# Altium PCB broken_sodimm_stackup.PcbDoc (part 3 of 7)
Units mm, origin at the board's own origin, x right, y up, seen from the top; angles counter-clockwise.
Board outline 69.63 x 30.03 mm, 8 copper layers (TOP, SIGA__, L3, PWR4, L5, L6, SIGB__, BOTTOM), stack 1.2 mm thick; 199 components, 229 nets, 1321 pads, 785 vias.
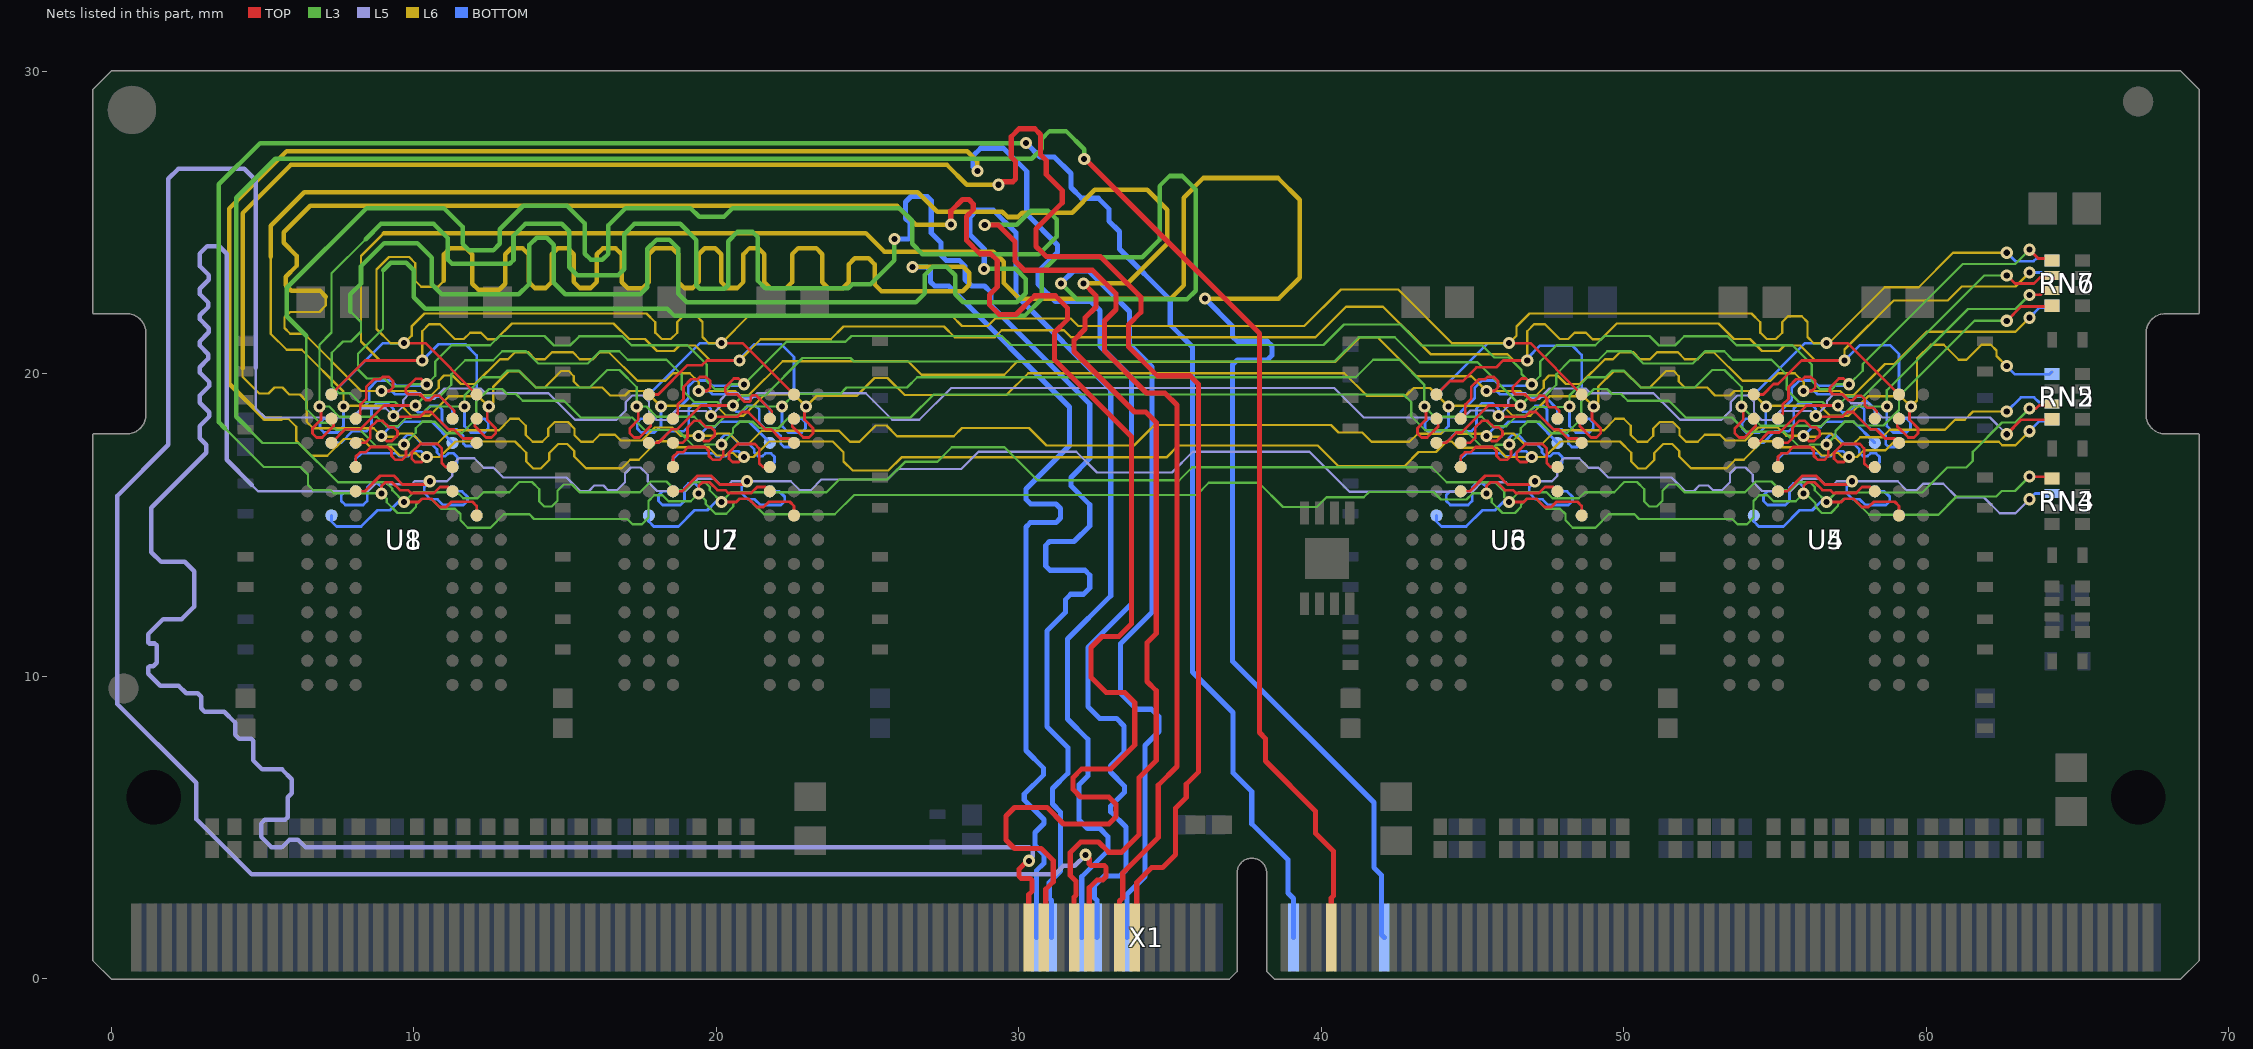
[diagram p8: the nets of this part, all layers, seen from the top]

## Via types
v1: diameter 0.4, hole 0.2, TOP to BOTTOM, tented both sides, 785 vias

## Nets (pads, with @x,y where several pads share a name; then routed paths per layer and width w, separated by ;. In a path a pad name is that pad's centre, name@x,y a point inside that pad or via, vN(x,y) a via of type N, cw(c..) or ccw(c..) an arc to the next point about the centre after c; other vN are vias at no path point) (continued)
A01: RN5.2 U1.L7 U2.L7 U3.L7 U4.L7 U5.L7 U6.L7 U7.L7 U8.L7 X1.133 | length 158.5
  TOP w0.09: U1.L7@8.073,17.717 8.388,17.717 8.553,17.882 8.553,18.225 8.772,18.444 8.962,18.444 9.17,18.237 9.322,18.237 9.453,18.106 9.453,17.969 9.265,17.78 9.093,17.78 v1(8.923,17.95) ; U2.L7@18.563,17.717 18.878,17.717 19.043,17.882 19.043,18.225 19.262,18.444 19.452,18.444 19.66,18.237 19.812,18.237 19.943,18.106 19.943,17.969 19.755,17.78 19.583,17.78 v1(19.413,17.95) ; U3.L7@44.603,17.717 44.918,17.717 45.083,17.882 45.083,18.225 45.302,18.444 45.492,18.444 45.7,18.237 45.852,18.237 45.983,18.106 45.983,17.969 45.795,17.78 45.623,17.78 v1(45.453,17.95) ; U4.L7@55.093,17.717 55.408,17.717 55.573,17.882 55.573,18.225 55.792,18.444 55.982,18.444 56.19,18.237 56.342,18.237 56.473,18.106 56.473,17.969 56.285,17.78 56.113,17.78 v1(55.943,17.95)
  TOP w0.17: v1(29.322,26.25) 29.42,26.348 29.793,26.348 29.888,26.443 29.888,27.026 29.744,27.17 29.744,27.84 30.005,28.101 30.525,28.101 30.712,27.914 30.712,27.242 30.901,27.053 30.901,26.591 31.43,26.062 31.43,25.656 30.568,24.794 30.568,24.209 30.761,24.016 30.899,23.878 32.689,23.878 32.718,23.849 34.029,22.538 34.029,22.037 33.618,21.626 33.618,20.894 34.575,19.937 35.656,19.937 35.93,19.663 35.93,6.831 35.53,6.431 35.53,5.993 35.176,5.639 35.176,4.104 34.751,3.679 34.391,3.679 33.894,3.182 33.894,1.434 X1.133@33.825,1.365
  L6 w0.075: 4.334,20.182 4.334,19.9 4.882,19.352 5.193,19.352 5.387,19.546 5.65,19.546 5.879,19.317 6.231,19.317 6.459,19.089 6.459,18.408 6.667,18.2 8.673,18.2 v1(8.923,17.95) 8.954,17.92 9.415,17.92 9.523,18.028 9.931,18.028 10.273,17.687 10.77,17.687 11.22,18.136 12.808,18.136 13.184,18.513 13.466,18.513 13.698,18.28 13.698,17.979 13.923,17.755 14.239,17.755 14.436,17.952 14.436,18.191 14.654,18.41 15.088,18.41 15.31,18.188 15.31,17.967 15.522,17.755 15.913,17.755 16.144,17.985 16.646,17.985 16.834,17.797 17.53,17.797 17.959,18.226 18.532,18.226 18.808,17.95 v1(19.413,17.95) 19.939,17.95 20.017,18.028 20.421,18.028 20.763,17.687 21.063,17.687 21.496,18.119 24.048,18.119 24.413,17.755 24.729,17.755 25.265,18.291 25.618,18.291 25.972,17.937 27.847,17.937 28.117,18.207 30.335,18.207 30.911,17.631 33.805,17.631 34.483,18.309 40.318,18.309 40.565,18.062 41.345,18.062 41.653,17.755 42.912,17.755 43.181,18.023 43.956,18.023 44.058,18.125 44.422,18.125 44.524,18.023 45.38,18.023 v1(45.453,17.95) 45.484,17.92 45.945,17.92 46.053,18.028 46.353,18.028 46.694,17.687 47.3,17.687 47.75,18.136 49.338,18.136 49.715,18.513 49.996,18.513 50.228,18.28 50.228,17.979 50.453,17.755 50.768,17.755 50.965,17.952 50.965,18.191 51.184,18.41 51.618,18.41 51.84,18.188 51.84,17.967 52.052,17.755 52.443,17.755 52.674,17.985 53.176,17.985 53.364,17.797 54.01,17.797 54.439,18.226 55.089,18.226 55.365,17.95 v1(55.943,17.95) 55.973,17.92 56.435,17.92 56.543,18.028 56.843,18.028 57.184,17.687 57.593,17.687 57.809,17.902 58.536,17.902 58.785,18.151 60.614,18.151 60.943,18.48 61.27,18.48 61.544,18.753 v1(62.656,18.753)
  L6 w0.15: 4.334,20.182 4.334,25.316 5.923,26.905 27.621,26.905 28.276,26.25 v1(29.322,26.25)
  BOTTOM w0.09: v1(8.923,17.95) 9.208,18.237 9.471,18.237 9.653,18.419 10.576,18.419 11.273,17.722 U8.L7@11.273,17.717 ; v1(19.413,17.95) 19.698,18.237 19.94,18.237 20.122,18.419 21.066,18.419 21.763,17.722 U7.L7@21.763,17.717 ; v1(45.453,17.95) 45.738,18.237 46.007,18.237 46.189,18.419 47.106,18.419 47.803,17.722 U6.L7@47.803,17.717 ; v1(55.943,17.95) 56.228,18.237 56.497,18.237 56.679,18.419 57.596,18.419 58.293,17.722 U5.L7@58.293,17.717 ; v1(62.656,18.753) 63.126,19.223 63.559,19.223 63.712,19.07 64.074,19.07 RN5.2@64.149,18.995
A02: RN7.1 U1.M3 U2.M3 U3.M3 U4.M3 U5.M3 U6.M3 U7.M3 U8.M3 X1.132 | length 160.5
  TOP w0.09: v1(10.423,19.654) 10.241,19.836 10.054,19.836 9.728,19.51 9.728,19.399 9.803,19.324 10.206,19.324 10.404,19.126 10.531,19.126 10.684,19.279 10.823,19.279 11.334,18.768 11.334,18.578 U1.M3@11.273,18.517 ; v1(20.913,19.654) 20.725,19.842 20.574,19.842 20.293,19.561 20.293,19.404 20.373,19.324 20.685,19.324 20.932,19.077 21.088,19.077 21.131,19.12 21.131,19.236 21.186,19.291 21.301,19.291 21.825,18.768 21.825,18.578 U2.M3@21.763,18.517 ; v1(46.953,19.654) 46.765,19.842 46.614,19.842 46.323,19.551 46.323,19.414 46.413,19.324 46.736,19.324 46.934,19.126 47.061,19.126 47.207,19.272 47.36,19.272 47.455,19.177 47.455,18.979 47.542,18.892 47.74,18.892 47.864,18.768 47.864,18.578 U3.M3@47.803,18.517 ; v1(57.443,19.654) 57.255,19.842 57.104,19.842 56.813,19.551 56.813,19.414 56.903,19.324 57.226,19.324 57.424,19.126 57.551,19.126 57.697,19.272 57.85,19.272 57.959,19.163 57.959,18.965 58.041,18.882 58.239,18.882 58.354,18.768 58.354,18.578 U4.M3@58.293,18.517 ; v1(63.406,24.103) 63.697,23.812 RN7.1@64.149,23.812
  L3 w0.075: 8.979,23.424 8.979,21.489 8.15,20.66 8.15,20.141 8.449,19.842 9.028,19.842 9.279,19.591 9.823,19.591 9.886,19.654 v1(10.423,19.654) 10.704,19.935 10.704,20.41 11.241,20.947 12.52,20.947 12.826,21.252 14.312,21.252 14.629,20.935 15.157,20.935 15.468,21.246 16.894,21.246 17.193,20.947 19.04,20.947 19.68,20.307 19.68,19.765 19.951,19.494 20.348,19.494 20.508,19.654 v1(20.913,19.654) 22.317,21.058 24.267,21.058 24.461,21.252 29.435,21.252 29.737,20.95 40.066,20.95 40.743,21.627 42.612,21.627 43.303,20.936 45.317,20.936 45.715,20.538 46.196,20.538 46.611,20.123 46.611,19.996 v1(46.953,19.654) 47.234,19.935 47.234,20.41 47.771,20.947 49.05,20.947 49.356,21.252 50.842,21.252 51.159,20.935 51.687,20.935 51.998,21.246 53.424,21.246 53.723,20.947 55.57,20.947 56.21,20.307 56.21,19.765 56.481,19.494 56.878,19.494 57.038,19.654 v1(57.443,19.654) 57.894,20.105 57.894,20.328 61.2,23.633 62.936,23.633 v1(63.406,24.103)
  L3 w0.15: 8.979,23.424 9.233,23.678 9.747,23.678 9.996,23.429 9.996,22.528 10.375,22.149 18.378,22.149 18.614,21.913 30.184,21.913 30.756,22.484 30.756,23.368 31.243,23.855 34.073,23.855 34.647,24.429 34.647,26.208 34.979,26.54 35.399,26.54 35.844,26.095 35.844,22.75 35.556,22.462 31.919,22.462 v1(31.39,22.991)
  BOTTOM w0.09: U8.M3@8.073,18.517 8.073,18.649 8.524,19.1 8.524,19.523 8.78,19.779 9.238,19.779 9.408,19.609 10.378,19.609 v1(10.423,19.654) ; U7.M3@18.563,18.517 18.563,18.684 19.068,19.189 19.068,19.577 19.27,19.779 19.679,19.779 19.849,19.609 20.868,19.609 v1(20.913,19.654) ; U6.M3@44.603,18.517 44.603,18.729 45.067,19.193 45.067,19.536 45.31,19.779 45.719,19.779 45.889,19.609 46.908,19.609 v1(46.953,19.654) ; U5.M3@55.093,18.517 55.093,18.681 55.549,19.137 55.549,19.528 55.8,19.779 56.25,19.779 56.42,19.609 57.398,19.609 v1(57.443,19.654)
  BOTTOM w0.17: v1(31.39,22.991) 31.8,23.401 32.31,23.401 33.653,22.058 33.653,20.972 34.394,20.231 34.394,12.116 33.355,11.077 33.355,9.44 33.883,8.912 34.38,8.912 34.626,8.666 34.626,8.173 34.166,7.713 34.166,3.384 33.575,2.793 X1.132@33.575,1.365
A03: RN7.4 U1.K7 U2.K7 U3.K7 U4.K7 U5.K7 U6.K7 U7.K7 U8.K7 X1.131 | length 159.3
  TOP w0.09: U1.K7@8.073,16.917 8.073,17.258 8.219,17.405 8.398,17.405 8.573,17.58 9.126,17.58 9.255,17.451 9.255,17.293 9.39,17.158 9.606,17.158 9.733,17.285 9.733,17.605 v1(9.673,17.665) ; U2.K7@18.563,16.917 18.563,17.258 18.709,17.405 18.888,17.405 19.063,17.58 19.616,17.58 19.745,17.451 19.745,17.293 19.88,17.158 20.096,17.158 20.223,17.285 20.223,17.605 v1(20.163,17.665) ; U3.K7@44.603,16.917 44.603,17.258 44.749,17.405 44.928,17.405 45.103,17.58 45.656,17.58 45.785,17.451 45.785,17.293 45.92,17.158 46.136,17.158 46.263,17.285 46.263,17.605 v1(46.208,17.659) ; U4.K7@55.093,16.917 55.093,17.258 55.207,17.372 55.385,17.372 55.593,17.58 56.146,17.58 56.275,17.451 56.275,17.293 56.41,17.158 56.626,17.158 56.753,17.285 56.753,17.605 v1(56.693,17.665) ; v1(62.656,21.753) 63.126,22.223 64.112,22.223 64.122,22.214 RN7.4@64.149,22.186
  TOP w0.17: v1(28.869,24.923) 29.317,24.923 29.872,24.368 29.872,23.733 30.182,23.423 32.432,23.423 33.206,22.649 33.206,22.13 32.825,21.749 32.825,20.76 34.218,19.367 34.823,19.367 35.222,18.968 35.222,7.019 34.603,6.4 34.603,4.675 33.43,3.502 33.43,2.68 33.325,2.575 X1.131@33.325,1.365
  L3 w0.075: 6.435,21.264 6.435,18.842 6.893,18.385 7.186,18.385 7.431,18.14 8.22,18.14 8.773,17.587 9.073,17.587 9.151,17.665 v1(9.673,17.665) 10.06,18.052 10.06,18.199 10.272,18.411 10.697,18.411 11.072,18.037 11.576,18.037 12.056,18.517 12.056,19.076 12.482,19.502 12.907,19.502 13.079,19.33 13.373,19.33 13.594,19.109 14.956,19.109 15.511,18.555 17.213,18.555 17.627,18.14 18.71,18.14 19.263,17.587 19.563,17.587 19.641,17.665 v1(20.163,17.665) 20.55,18.052 20.55,18.199 20.762,18.411 21.21,18.411 21.412,18.209 22.048,18.209 22.394,18.555 26.418,18.555 27.18,19.316 42.717,19.316 42.965,19.067 42.965,18.598 43.433,18.131 44.759,18.131 45.303,17.588 45.701,17.588 45.779,17.665 45.785,17.659 v1(46.208,17.659) 46.208,17.67 46.59,18.052 46.59,18.199 46.802,18.411 47.228,18.411 47.602,18.037 48.106,18.037 48.586,18.517 48.586,19.076 49.012,19.502 49.437,19.502 49.609,19.33 49.903,19.33 50.124,19.109 51.486,19.109 52.041,18.555 53.576,18.555 54.05,18.081 55.299,18.081 55.793,17.587 56.093,17.587 56.171,17.665 v1(56.693,17.665) 56.991,17.963 56.991,18.109 57.293,18.411 57.593,18.411 57.714,18.291 58.579,18.291 59.094,18.805 59.094,19.26 61.587,21.753 v1(62.656,21.753)
  L3 w0.15: 6.435,21.264 5.795,21.904 5.795,22.841 8.435,25.481 10.99,25.481 11.605,24.866 11.605,24.302 11.82,24.087 12.627,24.087 12.837,24.297 12.837,24.784 13.61,25.557 15.059,25.557 15.645,24.971 15.645,23.972 15.85,23.767 16.225,23.767 16.43,23.972 16.43,24.911 17,25.481 19.137,25.481 19.426,25.192 20.249,25.192 20.537,25.48 22.2,25.48 22.201,25.481 26.043,25.481 26.467,25.057 26.467,24.296 26.809,23.954 30.662,23.954 31.243,24.535 31.243,25.108 30.96,25.391 30.391,25.391 29.923,24.923 v1(28.869,24.923)
  BOTTOM w0.09: v1(9.673,17.665) 9.673,17.874 9.786,17.987 9.961,17.987 10.27,17.679 10.587,17.679 10.762,17.504 10.762,17.397 10.881,17.278 11.038,17.278 11.132,17.372 11.315,17.372 11.428,17.259 11.428,17.072 U8.K7@11.273,16.917 ; v1(20.163,17.665) 20.163,17.874 20.276,17.987 20.451,17.987 20.76,17.679 21.077,17.679 21.252,17.504 21.252,17.397 21.371,17.278 21.528,17.278 21.622,17.372 21.805,17.372 21.918,17.259 21.918,17.072 U7.K7@21.763,16.917 ; v1(46.208,17.659) 46.208,17.869 46.203,17.874 46.316,17.987 46.491,17.987 46.8,17.679 47.117,17.679 47.292,17.504 47.292,17.397 47.411,17.278 47.568,17.278 47.662,17.372 47.845,17.372 47.958,17.259 47.958,17.072 U6.K7@47.803,16.917 ; v1(56.693,17.665) 56.693,17.874 56.806,17.987 56.981,17.987 57.29,17.679 57.607,17.679 57.782,17.504 57.782,17.397 57.901,17.278 58.058,17.278 58.152,17.372 58.335,17.372 58.448,17.259 58.448,17.072 U5.K7@58.293,16.917
A04: RN5.1 U1.K3 U2.K3 U3.K3 U4.K3 U5.K3 U6.K3 U7.K3 U8.K3 X1.128 | length 157.7
  TOP w0.09: v1(10.423,17.249) 10.256,17.082 10.038,17.082 9.923,17.197 9.923,17.392 10.21,17.679 10.779,17.679 10.921,17.537 10.921,17.045 11.049,16.917 U1.K3@11.273,16.917 ; v1(20.913,17.249) 20.746,17.082 20.528,17.082 20.413,17.197 20.413,17.392 20.7,17.679 21.269,17.679 21.411,17.537 21.411,17.045 21.539,16.917 U2.K3@21.763,16.917 ; v1(46.953,17.249) 46.786,17.082 46.568,17.082 46.453,17.197 46.453,17.392 46.74,17.679 47.309,17.679 47.451,17.537 47.451,17.045 47.579,16.917 U3.K3@47.803,16.917 ; v1(57.443,17.249) 57.276,17.082 57.058,17.082 56.943,17.197 56.943,17.392 57.23,17.679 57.799,17.679 57.941,17.537 57.941,17.045 58.069,16.917 U4.K3@58.293,16.917
  L6 w0.075: 5.607,18.517 5.842,18.517 6.111,18.248 6.111,17.792 6.614,17.289 7.133,17.289 7.69,17.846 8.29,17.846 8.548,17.588 9.238,17.588 9.523,17.303 9.823,17.303 9.895,17.374 10.064,17.374 10.189,17.249 v1(10.423,17.249) 10.852,17.249 11.369,17.766 13.337,17.766 13.711,17.392 13.711,17.106 13.943,16.873 14.195,16.873 14.472,17.15 14.472,17.384 14.768,17.679 15.068,17.679 15.301,17.447 15.301,17.266 15.688,16.88 16.875,16.88 17.153,17.158 17.432,17.158 18.046,17.772 18.395,17.772 18.597,17.57 19.745,17.57 20.013,17.303 20.309,17.303 20.386,17.379 20.555,17.379 20.685,17.249 v1(20.913,17.249) 21.225,17.249 21.742,17.766 23.844,17.766 24.201,17.41 24.201,17.106 24.504,16.802 25.683,16.802 26.119,17.238 34.876,17.238 35.267,17.629 39.878,17.629 40.553,16.954 42.753,16.954 43.212,17.413 43.786,17.413 44.134,17.761 44.311,17.761 44.518,17.554 45.801,17.554 46.103,17.253 46.949,17.253 v1(46.953,17.249) 47.382,17.249 47.899,17.766 49.867,17.766 50.24,17.392 50.24,17.106 50.473,16.873 50.725,16.873 51.002,17.15 51.002,17.384 51.298,17.679 51.598,17.679 51.831,17.447 51.831,17.266 52.218,16.88 53.405,16.88 53.683,17.158 53.962,17.158 54.576,17.772 54.925,17.772 55.127,17.57 56.275,17.57 56.543,17.303 56.839,17.303 56.916,17.379 57.085,17.379 57.215,17.249 v1(57.443,17.249) 57.705,17.249 57.929,17.473 58.649,17.473 58.931,17.755 62.392,17.755 62.506,17.641 62.943,17.641 v1(63.406,18.103)
  L6 w0.15: 5.607,18.517 5.057,18.517 3.897,19.677 3.897,25.465 5.787,27.355 28.291,27.355 28.623,27.023 v1(28.623,26.707)
  BOTTOM w0.09: U8.K3@8.073,16.917 8.073,17.186 8.257,17.37 9.422,17.37 9.517,17.275 9.806,17.275 9.974,17.443 10.229,17.443 v1(10.423,17.249) ; U7.K3@18.563,16.917 18.563,17.186 18.747,17.37 19.912,17.37 20.007,17.275 20.296,17.275 20.464,17.443 20.719,17.443 v1(20.913,17.249) ; U6.K3@44.603,16.917 44.603,17.186 44.787,17.37 45.952,17.37 46.047,17.275 46.336,17.275 46.504,17.443 46.759,17.443 v1(46.953,17.249) ; U5.K3@55.093,16.917 55.093,17.186 55.277,17.37 56.442,17.37 56.537,17.275 56.826,17.275 56.994,17.443 57.249,17.443 v1(57.443,17.249) ; v1(63.406,18.103) 63.739,18.436 RN5.1@64.149,18.436
  BOTTOM w0.17: v1(28.623,26.707) 28.484,26.846 28.484,27.208 28.735,27.459 29.491,27.459 30.256,26.694 30.256,25.282 31.275,24.263 31.275,24.02 30.632,23.377 30.632,22.964 31.206,22.39 32.383,22.39 32.677,22.096 32.677,20.92 33.72,19.877 33.72,12.399 32.279,10.958 32.279,8.997 32.665,8.611 33.221,8.611 33.471,8.361 33.471,7.485 33.022,7.036 33.022,6.833 33.489,6.366 33.489,6.169 33.032,5.712 33.032,5.519 33.535,5.016 33.535,3.595 33.341,3.401 32.821,3.401 32.497,3.077 32.497,2.675 32.575,2.597 X1.128@32.575,1.365
A05: RN7.2 U1.L8 U2.L8 U3.L8 U4.L8 U5.L8 U6.L8 U7.L8 U8.L8 X1.126 | length 160.9
  TOP w0.09: U1.L8@7.273,17.717 7.728,18.172 8.231,18.172 9.013,18.954 v1(10.053,18.954) ; U2.L8@17.763,17.717 18.075,17.717 18.53,18.172 18.706,18.172 19.486,18.952 20.541,18.952 v1(20.543,18.954) ; U3.L8@43.803,17.717 44.115,17.717 44.46,18.062 44.636,18.062 45.528,18.954 v1(46.583,18.954) ; U4.L8@54.293,17.717 54.427,17.717 54.772,18.062 55.141,18.062 56.033,18.954 v1(57.073,18.954) ; v1(62.656,23.253) 62.926,22.983 63.559,22.983 63.757,23.181 64.077,23.181 RN7.2@64.149,23.253
  L3 w0.075: 7.899,22.061 8.249,21.711 8.249,21.4 7.92,21.071 7.656,21.071 7.28,20.695 7.28,19.596 7.518,19.358 7.899,19.358 8.186,19.071 9.372,19.071 9.489,18.954 v1(10.053,18.954) 10.383,19.284 10.88,19.284 11.234,19.638 11.234,19.99 11.691,20.447 12.624,20.447 12.922,20.745 13.702,20.745 14.106,20.341 15.746,20.341 16.15,20.745 16.787,20.745 17.063,20.469 18.351,20.469 18.851,19.969 18.851,19.482 19.262,19.072 20.031,19.072 20.148,18.954 v1(20.543,18.954) 20.873,19.284 21.609,19.284 22.845,20.52 24.435,20.52 24.544,20.411 40.434,20.411 41.233,21.211 42.42,21.211 43.25,20.381 45.156,20.381 v1(46.583,18.954) 46.913,19.284 47.41,19.284 47.764,19.638 47.764,19.99 48.221,20.447 49.154,20.447 49.452,20.745 50.232,20.745 50.636,20.341 52.276,20.341 52.68,20.745 53.317,20.745 53.593,20.469 54.881,20.469 55.381,19.969 55.381,19.482 55.791,19.072 56.56,19.072 56.678,18.954 v1(57.073,18.954) 57.379,19.26 57.918,19.26 61.911,23.253 v1(62.656,23.253)
  L3 w0.15: 7.899,22.061 7.899,22.631 8.249,22.981 8.249,23.556 9.016,24.323 10.109,24.323 10.588,23.844 10.588,22.956 10.919,22.625 13.467,22.625 13.81,22.968 13.81,24.261 14.053,24.504 14.384,24.504 14.617,24.271 14.617,23.012 15.004,22.625 17.479,22.625 17.712,22.858 17.712,24.13 18.022,24.44 18.442,24.44 18.739,24.143 18.739,22.65 19.022,22.367 26.594,22.367 26.885,22.658 26.885,23.267 27.152,23.534 27.617,23.534 27.893,23.258 27.893,22.628 28.159,22.362 29.927,22.362 30.226,22.661 30.226,23.135 29.893,23.468 v1(28.851,23.468)
  BOTTOM w0.09: v1(10.053,18.954) 10.053,18.805 10.129,18.729 10.335,18.729 10.549,18.943 10.806,18.943 10.928,18.821 10.928,18.374 11.13,18.172 11.409,18.172 11.631,17.95 11.631,17.696 11.712,17.615 11.971,17.615 U8.L8@12.073,17.717 ; v1(20.543,18.954) 20.543,18.861 20.658,18.746 20.86,18.746 20.978,18.864 20.978,18.896 21.025,18.943 21.293,18.943 21.418,18.818 21.418,18.374 21.62,18.172 21.899,18.172 22.121,17.95 22.121,17.696 22.237,17.58 22.426,17.58 U7.L8@22.563,17.717 ; v1(46.583,18.954) 46.583,18.825 46.659,18.749 46.885,18.749 47.079,18.943 47.333,18.943 47.458,18.818 47.458,18.374 47.66,18.172 47.939,18.172 48.161,17.95 48.161,17.696 48.277,17.58 48.466,17.58 U6.L8@48.603,17.717 ; v1(57.073,18.954) 57.073,18.875 57.23,18.718 57.401,18.718 57.625,18.942 57.824,18.942 57.948,18.818 57.948,18.374 58.15,18.172 58.422,18.172 58.651,17.943 58.651,17.684 58.755,17.58 58.956,17.58 U5.L8@59.093,17.717
  BOTTOM w0.17: v1(28.851,23.468) 28.851,24.124 28.378,24.597 28.378,25.188 28.601,25.411 29.15,25.411 29.899,24.662 29.899,22.603 33.033,19.469 33.033,12.662 31.608,11.237 31.608,8.591 32.277,7.922 32.277,6.703 31.988,6.414 31.988,5.246 32.264,4.97 32.677,4.97 32.938,4.709 32.938,4.237 32.075,3.374 X1.126@32.075,1.365
A06: RN2.4 U1.L2 U2.L2 U3.L2 U4.L2 U5.L2 U6.L2 U7.L2 U8.L2 X1.127 | length 161.2
  TOP w0.09: v1(9.323,18.607) 9.346,18.584 10.207,18.584 10.358,18.735 10.558,18.735 11.121,18.172 11.306,18.172 11.618,17.86 11.93,17.86 U1.L2@12.073,17.717 ; v1(19.813,18.607) 19.836,18.584 20.697,18.584 20.848,18.735 21.048,18.735 21.611,18.172 21.796,18.172 22.108,17.86 22.42,17.86 U2.L2@22.563,17.717 ; v1(45.853,18.607) 45.876,18.584 46.737,18.584 46.888,18.735 47.088,18.735 47.651,18.172 47.836,18.172 48.148,17.86 48.46,17.86 U3.L2@48.603,17.717 ; v1(56.343,18.607) 56.366,18.584 57.227,18.584 57.378,18.735 57.578,18.735 58.141,18.172 58.326,18.172 58.638,17.86 58.95,17.86 U4.L2@59.093,17.717 ; v1(62.656,18.003) 63.136,18.483 RN2.4@64.102,18.483 ; RN2.4@64.149,18.436 RN2.4@64.102,18.483 ; RN2.4@64.157,18.499 64.141,18.483 RN2.4@64.102,18.483
  TOP w0.17: v1(32.2,4.1) 32.325,3.975 32.325,3.796 32.381,3.74 32.825,3.74 32.882,3.683 32.882,3.38 32.774,3.272 32.587,3.272 32.325,3.01 X1.127@32.325,1.365
  L5 w0.075: 4.771,20.207 4.771,18.856 5.073,18.555 7.972,18.555 8.28,18.862 9.068,18.862 v1(9.323,18.607) 9.646,18.93 9.646,19.137 9.864,19.355 10.209,19.355 10.395,19.17 10.662,19.17 11.005,19.513 12.205,19.513 12.364,19.355 14.447,19.355 15.322,18.48 16.693,18.48 17,18.787 17,19.067 17.215,19.282 17.565,19.282 17.767,19.08 17.767,18.721 18.015,18.473 18.338,18.473 18.635,18.77 19.65,18.77 v1(19.813,18.607) 20.136,18.93 20.136,19.137 20.354,19.355 20.699,19.355 20.884,19.17 21.152,19.17 21.337,19.355 24.937,19.355 25.812,18.48 26.708,18.48 27.758,19.53 40.424,19.53 41.4,18.555 44.689,18.555 44.926,18.791 45.669,18.791 v1(45.853,18.607) 46.176,18.93 46.176,19.137 46.394,19.355 46.74,19.355 46.924,19.17 47.192,19.17 47.535,19.513 48.735,19.513 48.894,19.355 50.977,19.355 51.852,18.48 53.223,18.48 53.53,18.787 53.53,19.067 53.745,19.282 54.095,19.282 54.297,19.08 54.297,18.721 54.545,18.473 54.868,18.473 55.165,18.77 56.18,18.77 v1(56.343,18.607) 56.711,18.975 56.711,19.105 56.923,19.317 57.223,19.317 57.514,19.026 58.071,19.026 58.543,18.555 62.105,18.555 v1(62.656,18.003)
  L5 w0.15: 4.771,20.207 4.771,26.398 4.384,26.785 2.214,26.785 1.881,26.452 1.881,17.652 0.191,15.962 0.191,9.085 2.8,6.476 2.8,5.282 4.63,3.452 31.192,3.452 31.473,3.733 31.848,3.733 32.2,4.085 v1(32.2,4.1)
  BOTTOM w0.09: U8.L2@7.273,17.717 7.585,17.717 7.974,18.106 8.432,18.106 8.596,18.27 8.596,18.852 8.775,19.031 9.126,19.031 9.323,18.834 v1(9.323,18.607) ; U7.L2@17.763,17.717 18.075,17.717 18.464,18.106 18.922,18.106 19.086,18.27 19.086,18.852 19.265,19.031 19.616,19.031 19.813,18.834 v1(19.813,18.607) ; U6.L2@43.803,17.717 44.115,17.717 44.504,18.106 44.962,18.106 45.126,18.27 45.126,18.852 45.305,19.031 45.656,19.031 45.853,18.834 v1(45.853,18.607) ; U5.L2@54.293,17.717 54.605,17.717 54.994,18.106 55.452,18.106 55.616,18.27 55.616,18.852 55.795,19.031 56.146,19.031 56.343,18.834 v1(56.343,18.607)
A07: RN7.3 U1.M8 U2.M8 U3.M8 U4.M8 U5.M8 U6.M8 U7.M8 U8.M8 X1.122 | length 153.8
  TOP w0.09: v1(6.873,18.917) 6.928,18.862 6.928,18.484 6.646,18.202 6.646,18.033 6.783,17.896 6.964,17.896 7.338,18.27 7.338,18.452 U1.M8@7.273,18.517 ; v1(17.363,18.917) 17.418,18.862 17.418,18.484 17.136,18.202 17.136,18.033 17.273,17.896 17.454,17.896 17.824,18.266 17.824,18.456 U2.M8@17.763,18.517 ; v1(43.403,18.917) 43.458,18.862 43.458,18.484 43.176,18.202 43.176,18.033 43.313,17.896 43.494,17.896 43.864,18.266 43.864,18.456 U3.M8@43.803,18.517 ; v1(53.893,18.917) 53.948,18.862 53.948,18.484 53.666,18.202 53.666,18.033 53.803,17.896 53.984,17.896 54.354,18.266 54.354,18.456 U4.M8@54.293,18.517 ; v1(63.406,22.603) 63.418,22.615 63.762,22.615 63.858,22.711 64.157,22.711 RN7.3@64.157,22.749
  L3 w0.075: 8.404,24.452 7.277,23.324 7.277,21.367 6.873,20.963 v1(6.873,18.917) 7.196,18.917 7.533,18.58 8.771,18.58 9.081,18.27 9.463,18.27 9.745,18.552 9.904,18.552 9.969,18.617 10.206,18.617 10.506,18.917 v1(11.673,18.917) 11.673,19.286 12.27,19.883 12.856,19.883 13.076,20.103 13.468,20.103 14.025,19.546 15.811,19.546 16.389,20.124 16.794,20.124 17.363,19.555 v1(17.363,18.917) 17.686,18.917 18.025,18.578 19.262,18.578 19.571,18.27 19.953,18.27 20.3,18.617 20.683,18.617 20.983,18.917 v1(22.163,18.917) 22.59,19.344 24.101,19.344 24.303,19.546 26.301,19.546 26.641,19.886 41.136,19.886 41.716,20.466 42.568,20.466 43.403,19.631 v1(43.403,18.917) 43.74,18.58 45.301,18.58 45.611,18.27 46.112,18.27 46.458,18.617 46.73,18.617 47.02,18.907 48.193,18.907 v1(48.203,18.917) 48.203,19.286 48.8,19.883 49.386,19.883 49.606,20.103 49.998,20.103 50.555,19.546 52.341,19.546 52.92,20.124 53.324,20.124 53.893,19.555 v1(53.893,18.917) 54.522,18.287 56.083,18.287 56.101,18.27 56.518,18.27 56.834,18.586 57.212,18.586 57.543,18.917 v1(58.693,18.917) 58.693,19.458 61.376,22.141 62.943,22.141 v1(63.406,22.603)
  L3 w0.15: 8.404,24.452 8.91,24.957 10.647,24.957 11.113,24.491 11.113,23.778 11.257,23.634 13.161,23.634 13.29,23.763 13.29,24.562 13.685,24.957 14.887,24.957 15.136,24.708 15.136,23.521 15.399,23.258 16.747,23.258 16.949,23.46 16.949,24.617 17.289,24.957 18.802,24.957 19.337,24.422 19.337,22.925 19.445,22.817 20.274,22.817 20.387,22.93 20.387,24.388 20.688,24.689 21.193,24.689 21.371,24.511 21.371,23.07 21.614,22.828 24.359,22.828 24.495,22.963 25.094,22.963 25.879,23.748 25.879,24.46 v1(25.881,24.462)
  BOTTOM w0.09: v1(11.673,18.917) 11.673,18.27 11.881,18.062 12.325,18.062 12.454,18.191 12.454,18.387 12.324,18.517 U8.M8@12.073,18.517 ; v1(22.163,18.917) 22.163,18.27 22.371,18.062 22.815,18.062 22.944,18.191 22.944,18.387 22.814,18.517 U7.M8@22.563,18.517 ; v1(48.203,18.917) 48.203,18.27 48.411,18.062 48.855,18.062 48.984,18.191 48.984,18.387 48.854,18.517 U6.M8@48.603,18.517 ; v1(58.693,18.917) 58.693,18.27 58.901,18.062 59.345,18.062 59.474,18.191 59.474,18.387 59.344,18.517 U5.M8@59.093,18.517
  BOTTOM w0.17: v1(25.881,24.462) 26.338,24.462 26.401,24.525 26.401,24.991 26.253,25.139 26.253,25.684 26.431,25.862 26.967,25.862 27.099,25.73 27.099,24.656 27.424,24.331 27.424,23.918 27.59,23.752 28.025,23.752 28.22,23.557 28.22,23.122 28.439,22.903 28.861,22.903 29.066,22.698 29.066,22.275 32.342,18.999 32.342,17.201 31.716,16.575 31.716,16.299 32.342,15.673 32.342,14.974 31.822,14.454 31.009,14.454 30.885,14.33 30.885,13.648 31.028,13.505 32.18,13.505 32.342,13.343 32.342,12.921 32.132,12.711 31.714,12.711 31.533,12.53 31.533,12.112 31.483,12.062 30.922,11.501 30.922,8.34 31.616,7.646 31.616,6.794 31.109,6.287 31.109,5.781 31.105,5.777 31.374,5.507 31.374,3.562 31,3.188 31,2.662 31.075,2.587 X1.122@31.075,1.365
A08: RN5.4 U1.M2 U2.M2 U3.M2 U4.M2 U5.M2 U6.M2 U7.M2 U8.M2 X1.125 | length 153.4
  TOP w0.09: U1.M2@12.073,18.517 12.012,18.456 12.012,18.266 12.382,17.896 12.563,17.896 12.7,18.033 12.7,18.202 12.418,18.484 12.418,18.862 v1(12.473,18.917) ; U2.M2@22.563,18.517 22.502,18.456 22.502,18.266 22.872,17.896 23.053,17.896 23.19,18.033 23.19,18.202 22.908,18.484 22.908,18.862 v1(22.963,18.917) ; U3.M2@48.603,18.517 48.542,18.456 48.542,18.266 48.912,17.896 49.093,17.896 49.23,18.033 49.23,18.202 48.948,18.484 48.948,18.862 v1(49.003,18.917) ; U4.M2@59.093,18.517 59.032,18.456 59.032,18.266 59.402,17.896 59.583,17.896 59.72,18.033 59.72,18.202 59.438,18.484 59.438,18.862 v1(59.493,18.917)
  TOP w0.17: X1.125@31.825,1.365 31.825,2.709 31.884,2.768 31.884,3.224 31.696,3.412 31.696,4.176 32.041,4.521 32.631,4.521 32.969,4.183 33.391,4.183 33.968,4.76 33.968,6.649 34.537,7.218 34.537,9.524 34.234,9.827 34.234,11.112 34.537,11.415 34.537,18.389 34.19,18.736 33.819,18.736 31.817,20.738 31.817,21.113 32.186,21.482 32.186,21.852 32.547,22.213 32.547,22.584 v1(32.14,22.991)
  L6 w0.075: 5.265,23.866 5.265,21.32 5.792,20.793 6.292,20.793 7.673,19.412 v1(7.673,18.917) 7.701,18.945 9.585,18.945 9.913,18.617 10.51,18.617 11.148,19.255 12.136,19.255 v1(12.473,18.917) 12.625,19.069 12.625,19.582 13.123,20.08 13.49,20.08 14.023,19.546 14.325,19.546 14.87,20.091 15.115,20.091 15.284,19.922 15.284,19.745 15.483,19.546 16.221,19.546 16.485,19.283 16.977,19.283 17.125,19.43 17.65,19.43 v1(18.163,18.917) 18.19,18.945 19.994,18.945 20.322,18.617 20.896,18.617 21.597,19.318 22.562,19.318 v1(22.963,18.917) 23.326,19.28 24.645,19.28 25.227,19.862 25.657,19.862 26.222,19.297 29.579,19.297 30.305,20.023 40.752,20.023 41.496,19.28 42.798,19.28 43.048,19.529 43.591,19.529 v1(44.203,18.917) 44.231,18.945 45.993,18.945 46.321,18.617 46.904,18.617 47.542,19.255 48.666,19.255 v1(49.003,18.917) 49.155,19.069 49.155,19.582 49.653,20.08 50.019,20.08 50.553,19.546 50.855,19.546 51.4,20.091 51.645,20.091 51.814,19.922 51.814,19.745 52.013,19.546 52.751,19.546 53.014,19.283 53.508,19.283 53.655,19.43 54.18,19.43 v1(54.693,18.917) 54.721,18.945 56.483,18.945 56.811,18.617 57.428,18.617 58.065,19.255 59.156,19.255 v1(59.493,18.917) 59.692,19.116 59.692,20.505 60.146,20.96 60.571,20.96 61.067,20.463 61.323,20.463 61.818,20.958 62.129,20.958 62.319,20.768 62.319,20.59 v1(62.656,20.253)
  L6 w0.15: 5.265,23.866 5.265,24.894 6.376,26.005 26.651,26.005 27.296,25.36 29.454,25.36 29.628,25.185 29.96,25.185 30.106,25.331 31.758,25.331 32.507,26.08 34.246,26.08 34.899,25.427 34.899,24.297 33.593,22.991 v1(32.14,22.991)
  BOTTOM w0.09: U8.M2@7.273,18.517 7.022,18.517 6.892,18.387 6.892,18.191 7.021,18.062 7.465,18.062 7.673,18.27 v1(7.673,18.917) ; U7.M2@17.763,18.517 17.512,18.517 17.382,18.387 17.382,18.191 17.511,18.062 17.955,18.062 18.163,18.27 v1(18.163,18.917) ; U6.M2@43.803,18.517 43.552,18.517 43.422,18.387 43.422,18.191 43.551,18.062 43.995,18.062 44.203,18.27 v1(44.203,18.917) ; U5.M2@54.293,18.517 54.042,18.517 53.912,18.387 53.912,18.191 54.041,18.062 54.485,18.062 54.693,18.27 v1(54.693,18.917) ; v1(62.656,20.253) 62.926,19.983 64.07,19.983 64.122,20.035 RN5.4@64.149,20.062
A09: RN6.1 U1.M7 U2.M7 U3.M7 U4.M7 U5.M7 U6.M7 U7.M7 U8.M7 X1.121 | length 159.4
  TOP w0.09: U1.M7@8.073,18.517 8.228,18.672 8.228,18.984 8.418,19.174 8.418,19.565 8.673,19.82 8.883,19.82 8.959,19.896 9.168,19.896 9.307,19.756 9.307,19.552 9.189,19.434 v1(8.923,19.434) ; U2.M7@18.563,18.517 18.718,18.672 18.718,18.984 18.908,19.174 18.908,19.565 19.163,19.82 19.373,19.82 19.449,19.896 19.657,19.896 19.797,19.756 19.797,19.552 19.68,19.434 v1(19.413,19.434) ; U3.M7@44.603,18.517 44.758,18.672 44.758,18.984 44.948,19.174 44.948,19.565 45.203,19.82 45.413,19.82 45.489,19.896 45.698,19.896 45.838,19.756 45.838,19.552 45.719,19.434 v1(45.453,19.434) ; U4.M7@55.093,18.517 55.248,18.672 55.248,18.984 55.438,19.174 55.438,19.565 55.693,19.82 55.903,19.82 55.979,19.896 56.188,19.896 56.327,19.756 56.327,19.552 56.209,19.434 v1(55.943,19.434)
  TOP w0.17: v1(27.747,24.931) 27.747,25.378 28.132,25.763 28.344,25.763 28.491,25.616 28.491,25.427 28.262,25.198 28.262,24.416 28.707,23.971 29.063,23.971 29.282,23.752 29.282,22.868 29.021,22.607 29.021,22.285 29.349,21.957 29.898,21.957 30.524,22.583 31.198,22.583 31.6,22.181 31.6,21.791 31.176,21.367 31.176,20.463 33.719,17.92 33.719,11.739 33.299,11.319 32.746,11.319 32.381,10.954 32.381,9.966 32.885,9.462 33.498,9.462 33.829,9.131 33.829,7.731 33.039,6.941 32.077,6.941 31.784,6.648 31.784,6.266 32.037,6.013 32.967,6.013 33.21,5.77 33.21,5.36 32.967,5.117 31.475,5.117 30.933,5.659 29.853,5.659 29.573,5.379 29.573,4.592 29.853,4.312 30.734,4.312 31.132,3.914 31.132,3.209 30.887,2.964 30.887,1.427 X1.121@30.825,1.365
  L6 w0.075: 7.087,22.553 7.087,22.257 6.877,22.047 5.907,22.047 5.719,21.859 5.719,21.511 5.907,21.323 6.37,21.323 8.259,19.434 v1(8.923,19.434) 10.043,19.434 10.185,19.292 10.573,19.292 10.818,19.536 10.818,19.767 10.995,19.944 11.276,19.944 11.559,19.661 12.02,19.661 12.845,20.486 13.112,20.486 13.341,20.715 13.783,20.715 14.012,20.486 14.333,20.486 14.563,20.715 15.254,20.715 15.483,20.486 15.914,20.486 16.144,20.715 16.441,20.715 17.387,19.769 18.314,19.769 18.566,20.021 19.12,20.021 19.413,19.728 v1(19.413,19.434) 20.62,19.434 20.763,19.291 21.063,19.291 22.189,20.417 26.331,20.417 26.777,19.971 29.513,19.971 29.938,20.396 40.463,20.396 41.277,21.211 41.851,21.211 43.139,19.923 44.964,19.923 v1(45.453,19.434) 46.573,19.434 46.715,19.292 47.103,19.292 47.348,19.536 47.348,19.767 47.525,19.944 47.806,19.944 48.089,19.661 48.55,19.661 49.374,20.486 49.642,20.486 49.872,20.715 50.313,20.715 50.542,20.486 50.863,20.486 51.093,20.715 51.784,20.715 52.013,20.486 52.445,20.486 52.674,20.715 52.971,20.715 53.917,19.769 54.844,19.769 55.096,20.021 55.65,20.021 55.943,19.728 v1(55.943,19.434) 57.15,19.434 57.293,19.292 57.593,19.292 58.629,20.327 58.942,20.327 60.006,21.391 62.943,21.391 v1(63.406,21.853)
  L6 w0.15: 7.087,22.553 6.893,22.747 5.943,22.747 5.762,22.928 5.762,23.21 6.118,23.566 6.118,23.907 5.694,24.331 5.694,24.679 6.57,25.555 25.969,25.555 26.593,24.931 v1(27.747,24.931)
  BOTTOM w0.09: v1(8.923,19.434) 9.265,19.434 9.375,19.324 10.229,19.324 10.307,19.246 10.856,19.246 11.273,18.829 U8.M7@11.273,18.517 ; v1(19.413,19.434) 19.755,19.434 19.865,19.324 20.719,19.324 20.797,19.246 21.346,19.246 21.763,18.829 U7.M7@21.763,18.517 ; v1(45.453,19.434) 45.795,19.434 45.905,19.324 46.759,19.324 46.837,19.246 47.386,19.246 47.803,18.829 U6.M7@47.803,18.517 ; v1(55.943,19.434) 56.285,19.434 56.395,19.324 57.249,19.324 57.327,19.246 57.876,19.246 58.293,18.829 U5.M7@58.293,18.517 ; v1(63.406,21.853) 63.739,22.186 RN6.1@64.149,22.186
A10: RN3.1 U1.J3 U2.J3 U3.J3 U4.J3 U5.J3 U6.J3 U7.J3 U8.J3 X1.146 | length 158.7
  TOP w0.09: v1(8.923,16.05) 8.923,16.286 9.053,16.416 9.28,16.416 9.541,16.155 9.802,16.155 9.898,16.059 10.656,16.059 10.857,16.26 11.13,16.26 U1.J3@11.273,16.117 ; v1(19.413,16.05) 19.413,16.286 19.543,16.416 19.77,16.416 20.031,16.155 20.292,16.155 20.388,16.059 21.146,16.059 21.347,16.26 21.62,16.26 U2.J3@21.763,16.117 ; v1(45.453,16.05) 45.453,16.286 45.583,16.416 45.81,16.416 46.071,16.155 46.332,16.155 46.428,16.059 47.186,16.059 47.387,16.26 47.66,16.26 U3.J3@47.803,16.117 ; v1(55.943,16.05) 55.943,16.286 56.073,16.416 56.3,16.416 56.561,16.155 56.822,16.155 56.918,16.059 57.676,16.059 57.877,16.26 58.15,16.26 U4.J3@58.293,16.117 ; v1(63.406,16.603) v1(63.406,16.603) 64.147,16.602 RN3.1@64.149,16.6
  L3 w0.075: 3.745,18.206 5.03,16.921 6.248,16.921 6.498,16.671 6.498,16.326 6.669,16.155 7.245,16.155 7.35,16.05 v1(8.923,16.05) 9.102,15.871 9.102,15.753 9.453,15.402 9.866,15.402 10.068,15.604 10.068,15.683 10.247,15.861 10.577,15.861 10.897,15.542 11.356,15.542 11.536,15.362 11.536,15.157 11.778,14.915 12.532,14.915 12.971,15.354 13.821,15.354 13.971,15.205 17.049,15.205 17.224,15.03 17.537,15.03 17.756,15.249 17.756,15.795 17.945,15.985 18.216,15.985 18.415,15.785 19.148,15.785 v1(19.413,16.05) 19.647,15.816 19.647,15.699 19.968,15.378 20.323,15.378 20.558,15.613 20.558,15.687 20.733,15.861 21.067,15.861 21.575,15.355 23.913,15.355 24.554,15.995 35.874,15.995 36.277,16.399 37.925,16.399 38.726,15.597 39.843,15.597 40.163,15.918 41.401,15.918 41.578,16.094 43.701,16.094 43.952,15.844 44.796,15.844 45.003,16.05 v1(45.453,16.05) 45.632,15.871 45.632,15.753 45.983,15.402 46.396,15.402 46.598,15.604 46.598,15.683 46.777,15.861 47.108,15.861 47.427,15.542 47.886,15.542 48.066,15.362 48.066,15.157 48.308,14.915 49.062,14.915 49.501,15.354 50.351,15.354 50.501,15.205 53.579,15.205 53.754,15.03 54.067,15.03 54.286,15.249 54.286,15.795 54.475,15.985 54.745,15.985 54.945,15.785 55.678,15.785 v1(55.943,16.05) 56.001,16.05 56.33,15.721 56.33,15.615 56.543,15.403 56.843,15.403 57.081,15.64 57.081,15.689 57.253,15.861 57.593,15.861 58.112,15.343 60.397,15.343 60.996,15.942 62.307,15.942 62.489,16.124 62.927,16.124 v1(63.406,16.603)
  L3 w0.15: 3.745,18.206 3.545,18.405 3.545,26.262 4.91,27.627 v1(30.238,27.627)
  BOTTOM w0.09: U8.J3@8.073,16.117 7.718,16.117 7.596,15.995 7.596,15.797 7.731,15.662 8.32,15.662 8.451,15.793 8.451,16.246 8.585,16.38 8.802,16.38 8.923,16.259 v1(8.923,16.05) ; U7.J3@18.563,16.117 18.208,16.117 18.086,15.995 18.086,15.797 18.221,15.662 18.81,15.662 18.941,15.793 18.941,16.246 19.075,16.38 19.292,16.38 19.413,16.259 v1(19.413,16.05) ; U6.J3@44.603,16.117 44.248,16.117 44.126,15.995 44.126,15.797 44.261,15.662 44.85,15.662 44.981,15.793 44.981,16.246 45.115,16.38 45.332,16.38 45.453,16.259 v1(45.453,16.05) ; U5.J3@55.093,16.117 54.738,16.117 54.616,15.995 54.616,15.797 54.751,15.662 55.34,15.662 55.471,15.793 55.471,16.246 55.605,16.38 55.822,16.38 55.943,16.259 v1(55.943,16.05)
  BOTTOM w0.17: v1(30.238,27.627) 30.695,27.17 31.169,27.17 31.716,26.623 31.716,26.161 32.073,25.804 32.622,25.804 32.972,25.454 32.972,25.055 33.323,24.704 33.323,24.129 35.001,22.451 35.001,21.624 35.738,20.887 35.738,10.146 37.077,8.807 37.077,6.809 37.698,6.188 37.698,5.128 38.892,3.934 38.892,2.841 39.075,2.658 X1.146@39.075,1.365
A11: RN6.4 U1.N2 U2.N2 U3.N2 U4.N2 U5.N2 U6.N2 U7.N2 U8.N2 X1.120 | length 160.8
  TOP w0.09: v1(9.673,21.014) 10.376,21.014 U1.N2@12.073,19.317 ; v1(20.163,21.014) 20.866,21.014 U2.N2@22.563,19.317 ; v1(46.203,21.014) 46.906,21.014 U3.N2@48.603,19.317 ; v1(56.693,21.014) 57.396,21.014 U4.N2@59.093,19.317
  L6 w0.075: 10.991,23.076 10.791,22.876 10.24,22.876 10.04,23.076 10.04,23.658 9.84,23.859 9.173,23.859 8.762,23.447 8.762,21.48 9.228,21.014 v1(9.673,21.014) 9.922,21.263 9.922,21.565 10.351,21.994 17.691,21.994 17.976,21.708 17.976,21.362 18.189,21.15 18.489,21.15 18.701,21.362 18.701,21.713 18.892,21.904 19.349,21.904 19.54,21.713 19.54,21.22 19.746,21.014 v1(20.163,21.014) 21.066,21.917 27.775,21.917 28.114,21.578 28.965,21.578 29.215,21.828 31.714,21.828 31.964,21.578 39.43,21.578 40.643,22.791 42.537,22.791 44.314,21.014 v1(46.203,21.014) 46.452,21.263 46.452,21.565 46.881,21.994 54.221,21.994 54.507,21.708 54.507,21.362 54.719,21.15 55.019,21.15 55.231,21.362 55.231,21.713 55.423,21.904 55.879,21.904 56.07,21.713 56.07,21.22 56.276,21.014 v1(56.693,21.014) 56.77,21.014 58.621,22.865 59.743,22.865 60.881,24.003 v1(62.656,24.003)
  L6 w0.15: 10.991,23.076 10.991,23.953 11.191,24.153 11.731,24.153 11.931,23.953 11.931,22.978 12.131,22.778 12.814,22.778 13.014,22.978 13.014,23.948 13.214,24.148 13.59,24.148 13.79,23.948 13.79,23.038 13.99,22.838 14.351,22.838 14.551,23.038 14.551,23.948 14.751,24.148 15.08,24.148 15.28,23.948 15.28,23.038 15.48,22.838 15.848,22.838 16.048,23.038 16.048,23.948 16.248,24.148 16.663,24.148 16.863,23.948 16.863,23.028 17.063,22.828 17.556,22.828 17.756,23.028 17.756,23.953 17.956,24.153 18.539,24.153 18.739,23.953 18.739,23.038 18.939,22.838 19.214,22.838 19.414,23.038 19.414,23.953 19.614,24.153 19.955,24.153 20.155,23.953 20.155,23.038 20.355,22.838 20.693,22.838 20.893,23.038 20.893,23.959 21.093,24.159 21.387,24.159 21.587,23.959 21.587,23.028 21.787,22.828 22.299,22.828 22.499,23.028 22.499,23.959 22.699,24.159 23.299,24.159 23.499,23.959 23.499,23.032 23.699,22.832 24.172,22.832 24.372,23.032 24.372,23.616 24.572,23.816 25.035,23.816 25.235,23.616 25.235,22.954 25.456,22.733 28.147,22.733 28.355,22.941 28.355,23.338 28.157,23.536 v1(26.485,23.536)
  BOTTOM w0.09: U8.N2@7.273,19.317 8.97,21.014 v1(9.673,21.014) ; U7.N2@17.763,19.317 19.46,21.014 v1(20.163,21.014) ; U6.N2@43.803,19.317 45.5,21.014 v1(46.203,21.014) ; U5.N2@54.293,19.317 55.99,21.014 v1(56.693,21.014) ; v1(62.656,24.003) 62.936,23.723 63.545,23.723 63.634,23.812 RN6.4@64.149,23.812
  BOTTOM w0.17: v1(26.485,23.536) 26.964,23.536 27.075,23.425 27.075,23.037 27.213,22.899 27.679,22.899 31.672,18.906 31.672,17.633 30.232,16.193 30.232,16.01 30.232,15.855 30.387,15.7 31.222,15.7 31.377,15.545 31.377,15.235 31.222,15.08 30.375,15.08 30.232,14.937 30.232,7.547 30.817,6.962 30.817,6.748 30.177,6.108 30.177,5.915 30.827,5.265 30.827,5.135 30.528,4.836 30.528,4.412 30.827,4.113 30.827,3.822 30.575,3.57 X1.120@30.575,1.365
A12: RN4.3 U1.J7 U2.J7 U3.J7 U4.J7 U5.J7 U6.J7 U7.J7 U8.J7 X1.119 | length 156.7
  TOP w0.09: U1.J7@8.073,16.117 8.373,16.117 8.886,16.63 9.335,16.63 9.62,16.345 10.419,16.345 v1(10.523,16.449) ; U2.J7@18.563,16.117 18.863,16.117 19.376,16.63 19.825,16.63 20.11,16.345 20.909,16.345 v1(21.013,16.449) ; U3.J7@44.603,16.117 44.903,16.117 45.416,16.63 45.865,16.63 46.15,16.345 46.949,16.345 v1(47.053,16.449) ; U4.J7@55.093,16.117 55.393,16.117 55.906,16.63 56.355,16.63 56.64,16.345 57.439,16.345 v1(57.543,16.449)
  TOP w0.17: X1.119@30.325,1.365 30.325,2.784 30.436,2.895 30.436,3.247 30.369,3.314 30.078,3.314 29.998,3.394 29.998,3.625 30.275,3.902 v1(30.327,3.902)
  L5 w0.075: 4.629,16.335 4.846,16.117 8.477,16.117 8.784,16.424 9.052,16.424 9.124,16.352 9.922,16.352 10.019,16.449 v1(10.523,16.449) 11.09,16.449 11.266,16.625 11.266,16.981 11.492,17.207 11.996,17.207 12.306,16.897 12.631,16.897 12.955,16.573 15.042,16.573 15.486,16.13 15.786,16.13 15.962,16.306 16.262,16.306 16.413,16.155 16.713,16.155 16.977,16.418 16.977,16.702 17.176,16.901 17.492,16.901 17.725,16.667 17.725,16.44 18.036,16.13 18.98,16.13 19.377,16.527 19.938,16.527 20.113,16.352 20.412,16.352 20.509,16.449 v1(21.013,16.449) 22.459,16.449 22.754,16.155 23.113,16.155 23.466,16.507 25.653,16.507 26.001,16.855 28.089,16.855 28.663,17.428 31.894,17.428 32.582,16.74 35.056,16.74 35.744,17.428 39.601,17.428 40.925,16.105 44.995,16.105 45.303,16.412 46.093,16.412 46.153,16.352 46.956,16.352 v1(47.053,16.449) 47.62,16.449 47.796,16.625 47.796,16.981 48.022,17.207 48.526,17.207 48.836,16.897 49.161,16.897 49.485,16.573 51.572,16.573 52.016,16.13 52.316,16.13 52.492,16.306 52.792,16.306 52.943,16.155 53.243,16.155 53.507,16.418 53.507,16.702 53.706,16.901 54.022,16.901 54.255,16.667 54.255,16.44 54.566,16.13 55.51,16.13 55.907,16.527 56.468,16.527 56.643,16.352 56.942,16.352 57.039,16.449 v1(57.543,16.449) 59.048,16.449 59.343,16.155 59.671,16.155 59.885,16.368 60.559,16.368 61.013,15.914 61.903,15.914 62.426,15.391 62.943,15.391 v1(63.406,15.853)
  L5 w0.15: 4.629,16.335 3.808,17.155 3.808,23.972 3.563,24.217 3.159,24.217 2.918,23.976 2.918,23.563 3.216,23.265 3.216,23.111 2.918,22.813 2.918,22.637 3.205,22.35 3.205,22.218 2.918,21.931 2.918,21.812 3.221,21.509 3.221,21.37 2.918,21.067 2.918,20.936 3.203,20.651 3.203,20.506 2.918,20.221 2.918,20.043 3.233,19.728 3.233,19.598 2.918,19.283 2.918,19.044 3.235,18.727 3.235,18.591 2.918,18.274 2.918,17.869 3.13,17.657 3.13,17.386 2.918,17.174 1.318,15.574 1.318,14.105 1.639,13.784 2.426,13.784 2.735,13.475 2.735,12.306 2.323,11.894 1.716,11.894 1.219,11.397 1.219,11.109 1.243,11.085 1.435,11.085 1.493,11.027 1.493,10.444 1.386,10.337 1.26,10.337 1.219,10.296 1.219,10.08 1.608,9.691 2.217,9.691 2.469,9.439 2.847,9.439 2.967,9.319 2.967,8.941 3.077,8.831 3.728,8.831 4.085,8.475 4.085,8.069 4.218,7.936 4.623,7.936 4.691,7.869 4.691,7.219 4.989,6.921 5.638,6.921 5.961,6.598 5.961,6.13 5.829,5.998 5.829,5.346 5.737,5.254 5.066,5.254 4.944,5.132 4.944,4.697 5.289,4.352 5.635,4.352 5.885,4.602 6.164,4.602 6.414,4.352 30.343,4.352 30.455,4.24 30.455,4.03 v1(30.327,3.902)
  BOTTOM w0.09: v1(10.523,16.449) 10.342,16.268 10.342,16.057 10.548,15.851 10.775,15.851 10.964,15.662 11.637,15.662 11.768,15.793 11.768,15.935 11.586,16.117 U8.J7@11.273,16.117 ; v1(21.013,16.449) 20.832,16.268 20.832,16.057 21.038,15.851 21.265,15.851 21.454,15.662 22.127,15.662 22.258,15.793 22.258,15.935 22.076,16.117 U7.J7@21.763,16.117 ; v1(47.053,16.449) 46.872,16.268 46.872,16.057 47.078,15.851 47.305,15.851 47.494,15.662 48.167,15.662 48.298,15.793 48.298,15.935 48.116,16.117 U6.J7@47.803,16.117 ; v1(57.543,16.449) 57.362,16.268 57.362,16.057 57.568,15.851 57.795,15.851 57.984,15.662 58.657,15.662 58.788,15.793 58.788,15.935 58.606,16.117 U5.J7@58.293,16.117 ; v1(63.406,15.853) 63.594,16.041 RN4.3@64.149,16.041
A13: RN6.3 U1.N8 U2.N8 U3.N8 U4.N8 U5.N8 U6.N8 U7.N8 U8.N8 X1.158 | length 162.9
  TOP w0.09: U1.N8@7.273,19.317 7.273,19.333 8.384,20.444 v1(10.273,20.444) ; U2.N8@17.763,19.317 18.075,19.317 19.044,20.286 19.523,20.286 19.681,20.444 v1(20.763,20.444) ; U3.N8@43.803,19.317 44.248,19.762 44.675,19.762 45.127,20.214 45.779,20.214 46.009,20.444 v1(46.803,20.444) ; U4.N8@54.293,19.317 54.605,19.317 54.95,19.662 55.091,19.662 55.873,20.444 v1(57.293,20.444)
  L6 w0.075: 9.009,24.655 8.249,23.895 8.249,21.072 8.877,20.444 v1(10.273,20.444) 10.273,21.411 10.497,21.635 10.861,21.635 11.347,21.15 11.647,21.15 11.856,21.359 12.214,21.359 12.431,21.142 12.715,21.142 13.236,21.663 16.6,21.663 17.113,21.15 17.637,21.15 18.031,20.756 18.595,20.756 18.778,20.939 19.302,20.939 19.797,20.444 v1(20.763,20.444) 21.461,21.142 23.778,21.142 24.202,21.566 27.518,21.566 27.875,21.209 29.198,21.209 29.43,21.441 31.489,21.441 31.721,21.209 39.8,21.209 40.811,22.22 42.038,22.22 43.606,20.652 46.143,20.652 46.351,20.444 v1(46.803,20.444) 46.803,21.411 47.027,21.635 47.391,21.635 47.877,21.15 48.157,21.15 48.366,21.359 48.744,21.359 48.961,21.142 49.245,21.142 49.766,21.663 53.13,21.663 53.643,21.15 54.167,21.15 54.561,20.756 55.125,20.756 55.308,20.939 55.832,20.939 56.327,20.444 v1(57.293,20.444) 57.293,20.801 58.919,22.427 60.703,22.427 61.167,22.891 62.943,22.891 v1(63.406,23.353)
  L6 w0.15: 9.009,24.655 24.932,24.655 25.545,24.042 29.153,24.042 29.495,23.7 29.495,23.003 30.009,22.489 35.016,22.489 35.449,22.922 35.449,25.826 36.097,26.474 38.563,26.474 39.284,25.753 39.284,23.18 38.593,22.489 v1(36.147,22.489)
  BOTTOM w0.09: v1(10.273,20.444) 10.807,20.978 11.707,20.978 12.073,20.612 U8.N8@12.073,19.317 ; v1(20.763,20.444) 20.763,20.49 21.255,20.982 22.14,20.982 22.563,20.559 U7.N8@22.563,19.317 ; v1(46.803,20.444) 46.803,20.504 47.229,20.93 48.292,20.93 48.603,20.619 U6.N8@48.603,19.317 ; v1(57.293,20.444) 57.798,20.949 58.796,20.949 59.093,20.652 U5.N8@59.093,19.317 ; v1(63.406,23.353) 63.805,23.353 63.909,23.249 RN6.3@64.157,23.249
  BOTTOM w0.17: v1(36.147,22.489) 37.064,21.572 37.064,21.386 37.064,21.231 37.219,21.076 38.207,21.076 38.362,20.921 38.362,20.611 38.207,20.456 37.219,20.456 37.064,20.301 37.064,20.253 37.064,10.5 41.735,5.829 41.735,3.675 41.98,3.43 41.98,1.46 X1.158@42.075,1.365
A14: RN2.3 U1.H2 U2.H2 U3.H2 U4.H2 U5.H2 U6.H2 U7.H2 U8.H2 X1.151 | length 159.5
  TOP w0.09: v1(9.673,15.765) 10.165,15.765 10.269,15.869 10.577,15.869 10.847,15.599 11.067,15.599 11.24,15.772 11.933,15.772 12.073,15.632 U1.H2@12.073,15.317 ; v1(20.163,15.765) 20.655,15.765 20.759,15.869 21.067,15.869 21.337,15.599 21.556,15.599 21.73,15.772 22.423,15.772 22.563,15.632 U2.H2@22.563,15.317 ; v1(46.203,15.765) 46.695,15.765 46.799,15.869 47.107,15.869 47.377,15.599 47.596,15.599 47.77,15.772 48.463,15.772 48.603,15.632 U3.H2@48.603,15.317 ; v1(56.693,15.765) 57.185,15.765 57.289,15.869 57.597,15.869 57.867,15.599 58.087,15.599 58.26,15.772 58.953,15.772 59.093,15.632 U4.H2@59.093,15.317 ; v1(63.406,18.853) 63.625,18.853 63.724,18.952 64.157,18.952 RN2.3@64.157,18.999
  TOP w0.17: v1(32.157,27.107) 32.181,27.107 34.002,25.286 37.949,21.339 37.949,8.139 38.149,7.939 38.149,7.199 39.806,5.542 39.806,4.814 40.4,4.22 40.4,2.745 40.325,2.67 X1.151@40.325,1.365
  L3 w0.075: 4.549,18.159 4.991,17.717 6.186,17.717 7.485,16.418 9.068,16.418 9.286,16.2 9.286,16.152 v1(9.673,15.765) 9.994,16.087 11.424,16.087 11.627,15.884 12.096,15.884 12.298,16.087 13.149,16.087 13.484,16.421 13.903,16.421 14.141,16.183 14.141,15.781 14.308,15.614 14.557,15.614 14.744,15.801 14.744,16.134 14.948,16.338 15.222,16.338 15.474,16.087 17.471,16.087 17.825,16.44 18.35,16.44 18.635,16.155 18.964,16.155 19.221,16.412 19.621,16.412 19.776,16.258 19.776,16.152 v1(20.163,15.765) 20.485,16.087 23.64,16.087 24.056,16.503 25.649,16.503 26.235,17.089 27.295,17.089 27.779,17.573 29.524,17.573 30.616,16.481 35.299,16.481 35.73,16.912 43.643,16.912 44.143,16.412 45.735,16.412 46.047,16.1 46.047,15.921 v1(46.203,15.765) 46.524,16.087 47.438,16.087 47.64,15.884 48.51,15.884 48.713,16.087 49.679,16.087 50.014,16.421 50.433,16.421 50.671,16.183 50.671,15.781 50.838,15.614 51.087,15.614 51.274,15.801 51.274,16.134 51.478,16.338 51.752,16.338 52.004,16.087 54.001,16.087 54.355,16.44 54.88,16.44 55.165,16.155 55.494,16.155 55.751,16.412 56.152,16.412 56.306,16.258 56.306,16.152 v1(56.693,15.765) 57.008,16.08 59.863,16.08 60.688,16.905 61.317,16.905 61.528,17.115 61.528,17.42 62.499,18.391 62.943,18.391 v1(63.406,18.853)
  L3 w0.15: 4.549,18.159 4.122,18.586 4.122,25.817 5.412,27.107 30.423,27.107 30.761,27.445 30.761,27.776 31.012,28.027 31.555,28.027 32.157,27.425 v1(32.157,27.107)
  BOTTOM w0.09: U8.H2@7.273,15.317 7.273,15.12 7.437,14.956 8.254,14.956 8.788,15.49 9.206,15.49 9.481,15.765 v1(9.673,15.765) ; U7.H2@17.763,15.317 17.763,15.12 17.927,14.956 18.744,14.956 19.278,15.49 19.696,15.49 19.971,15.765 v1(20.163,15.765) ; U6.H2@43.803,15.317 43.803,15.12 43.967,14.956 44.784,14.956 45.318,15.49 45.736,15.49 46.011,15.765 v1(46.203,15.765) ; U5.H2@54.293,15.317 54.293,15.12 54.457,14.956 55.274,14.956 55.808,15.49 56.226,15.49 56.501,15.765 v1(56.693,15.765)